# Altium PCB MainPCB.PcbDoc (part 1 of 2)
Units mm, origin at the board's own origin, x right, y up, seen from the top; angles counter-clockwise.
Board outline 53.21 x 33.91 mm, 4 copper layers (Top Layer, Ground, Power, Bottom Layer), stack 0.603 mm thick; 43 components, 63 nets, 250 pads, 105 vias.
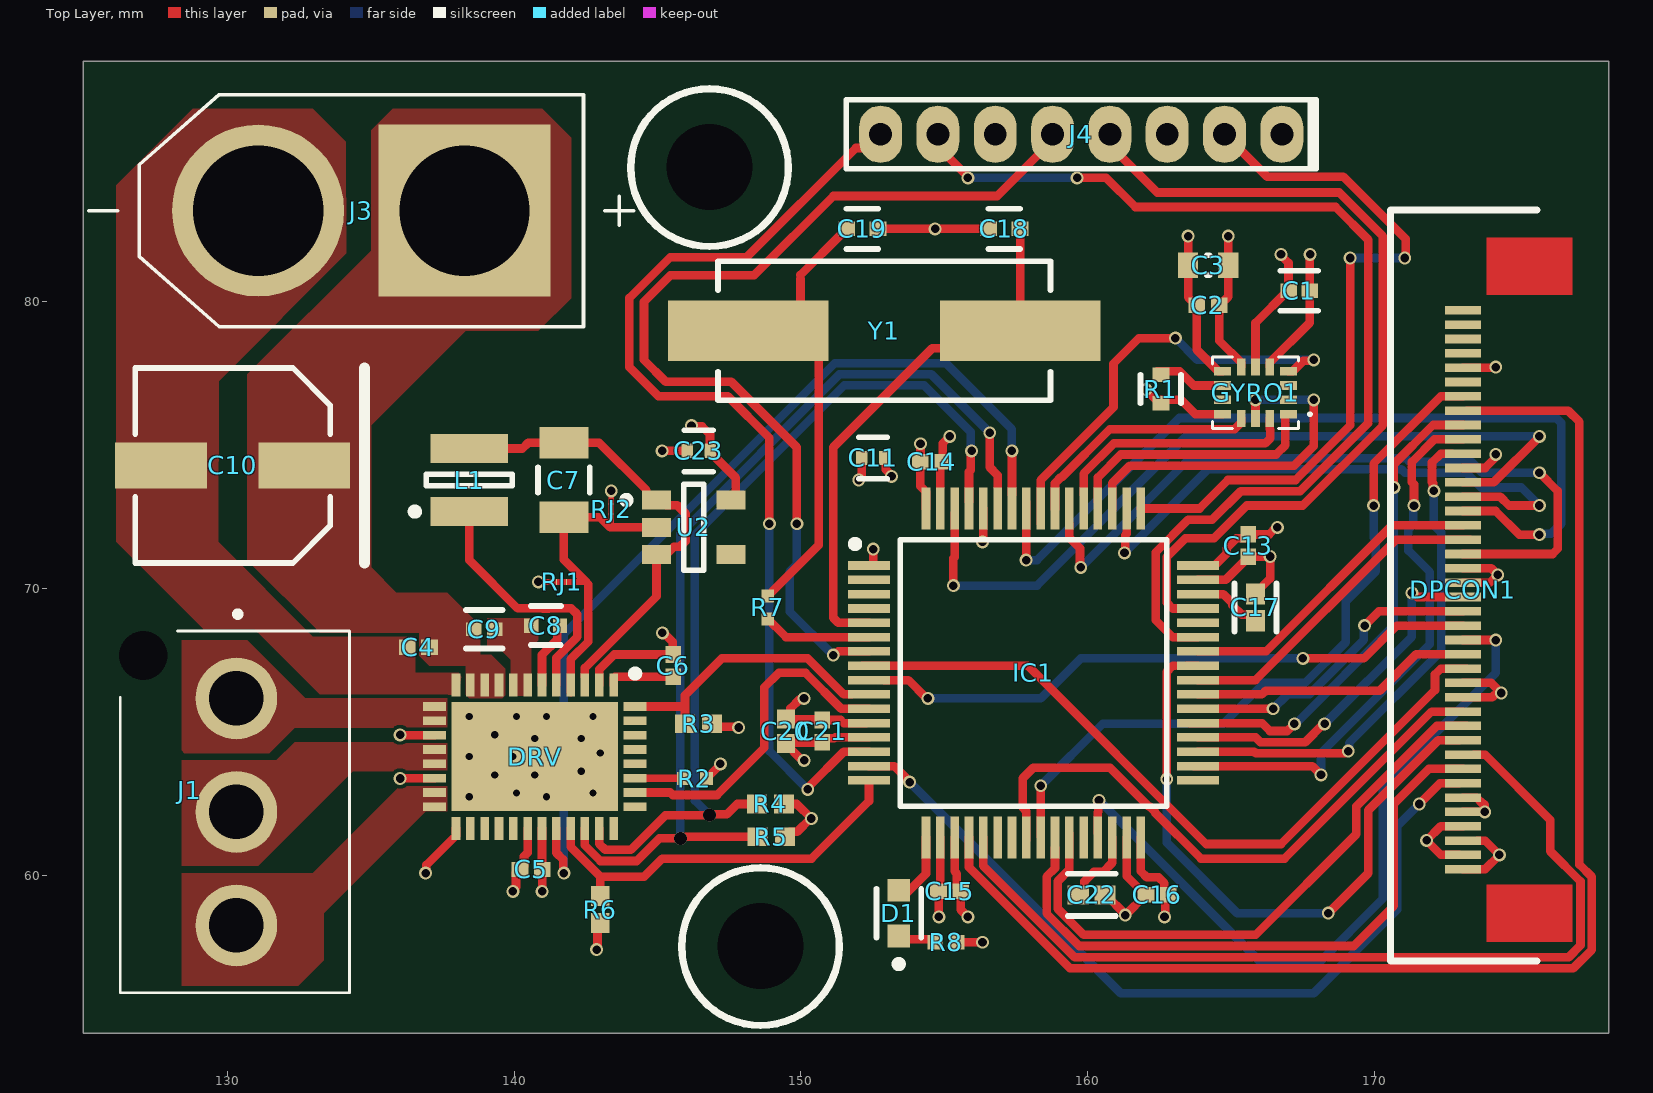
[diagram p0: Top Layer view]
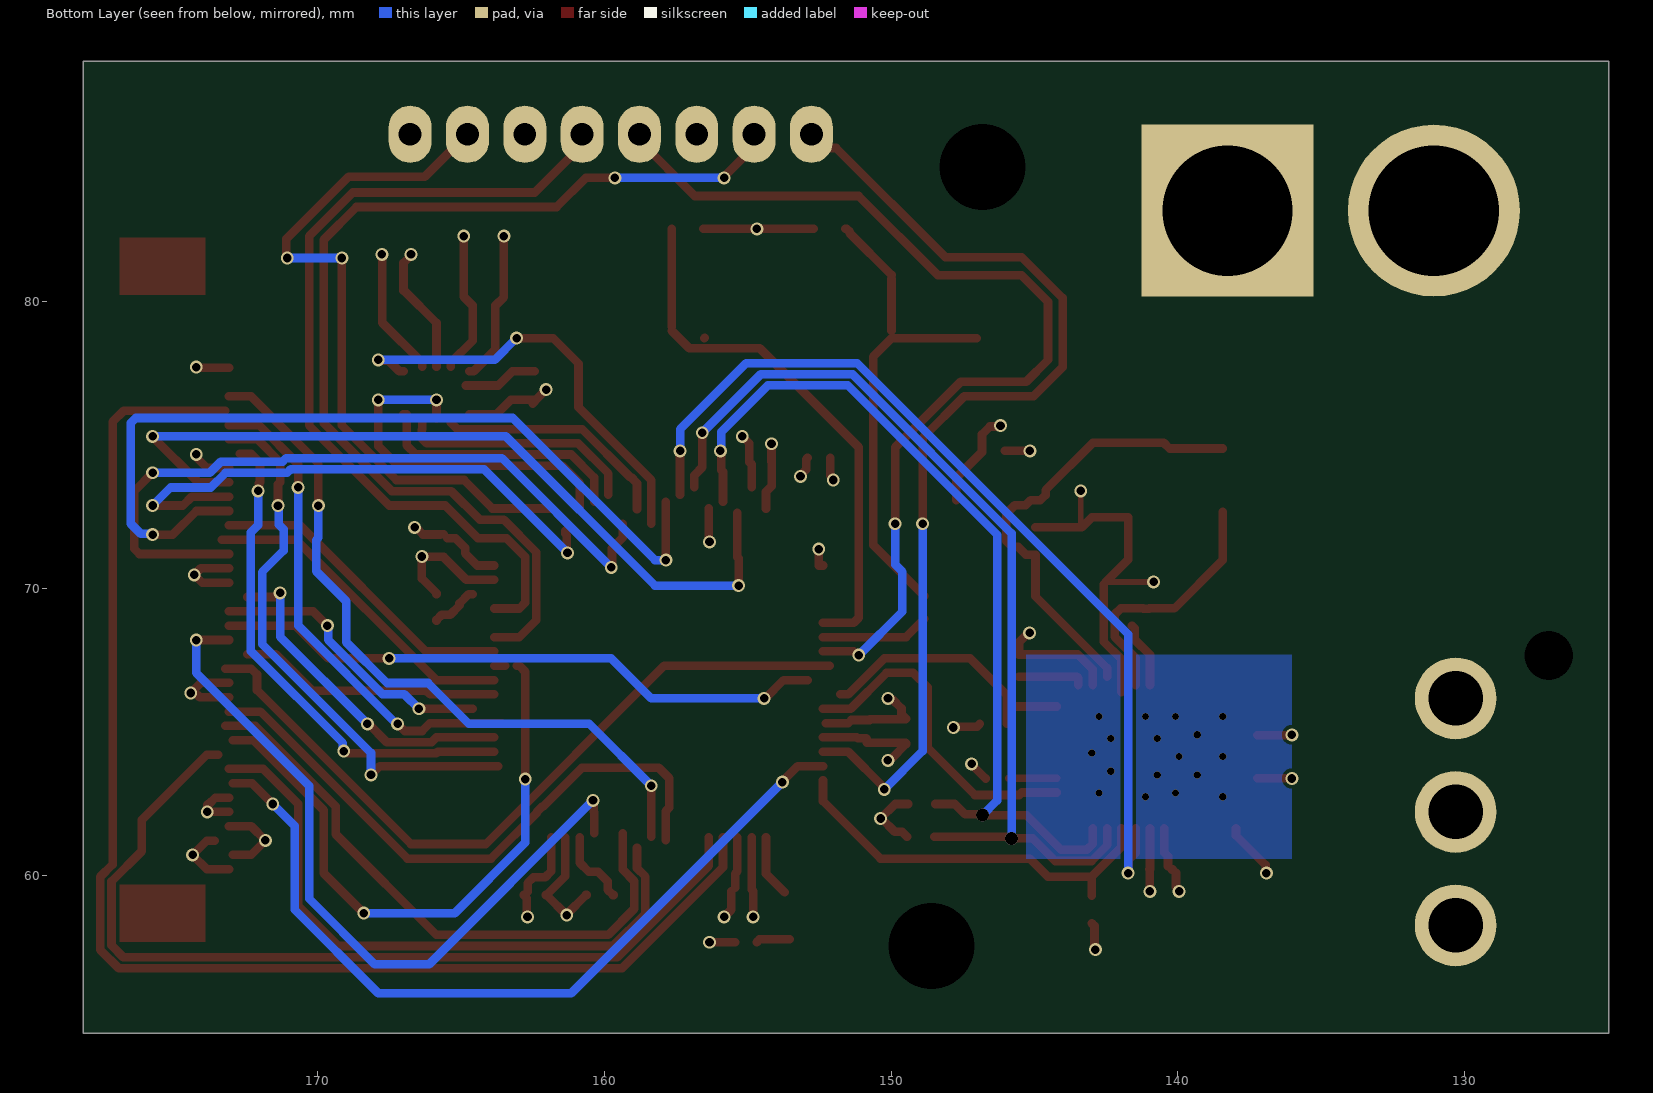
[diagram p1: Bottom Layer view, seen from below]
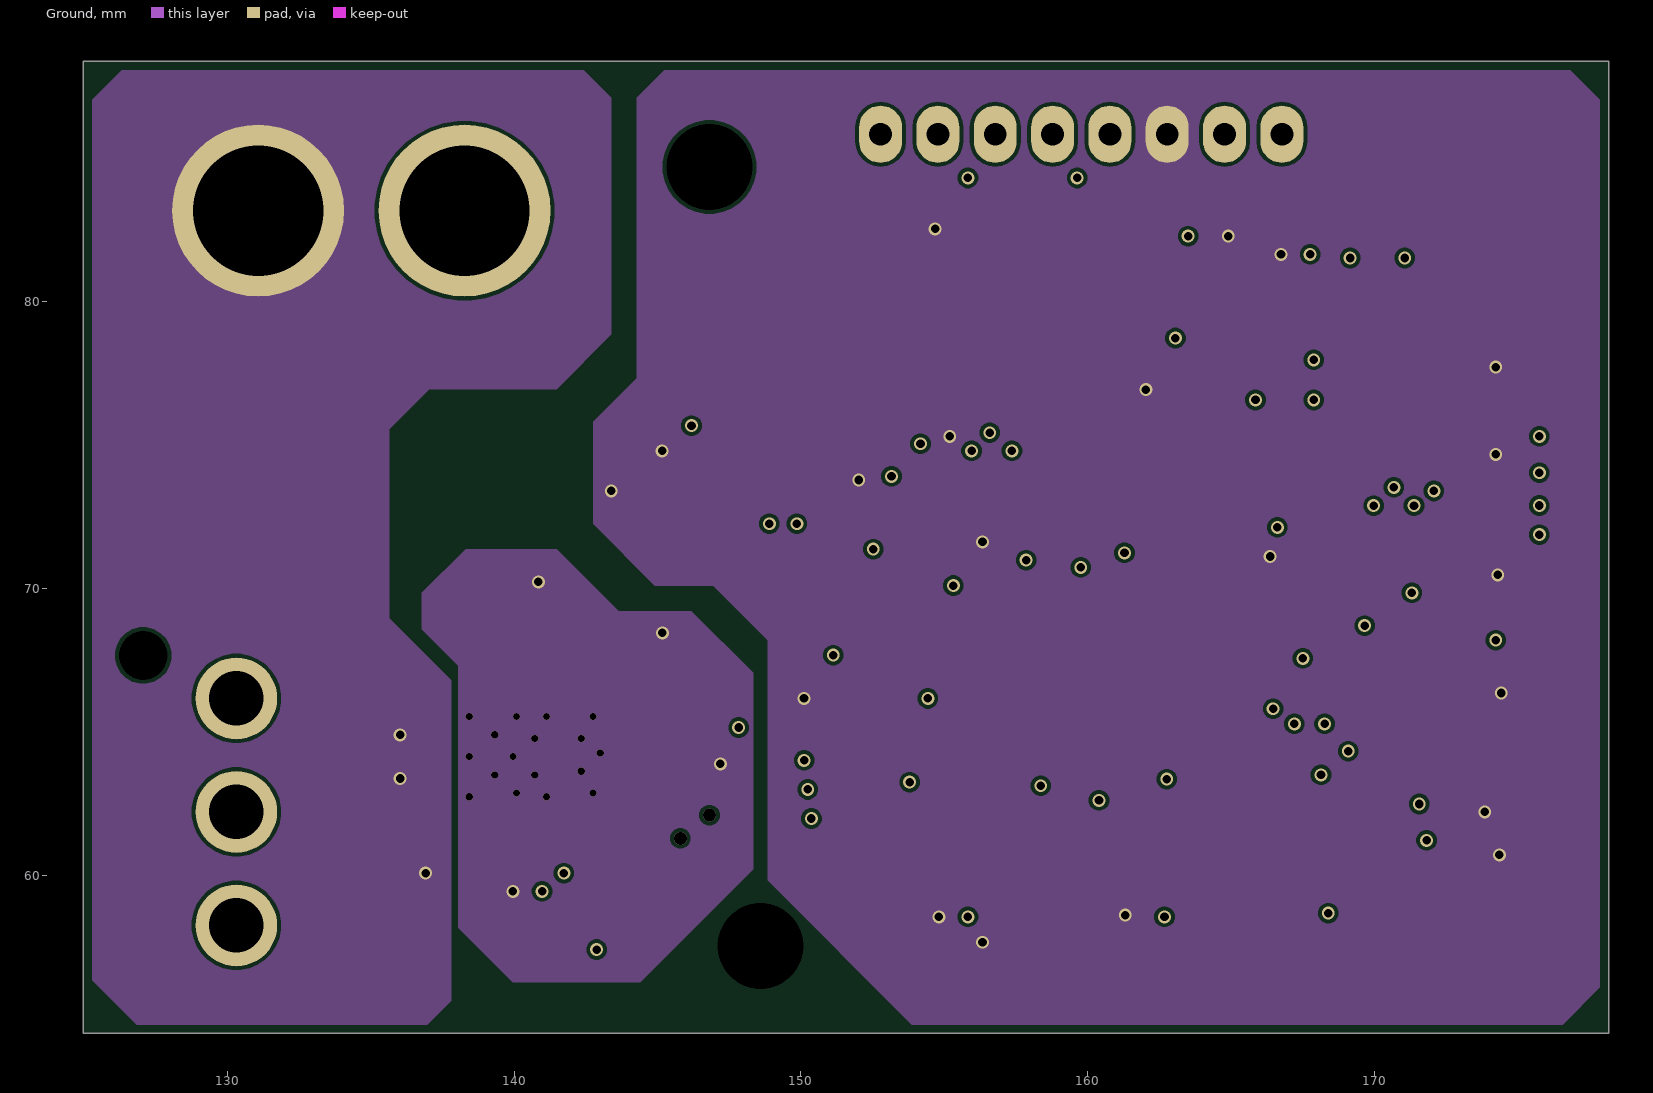
[diagram p2: Ground]
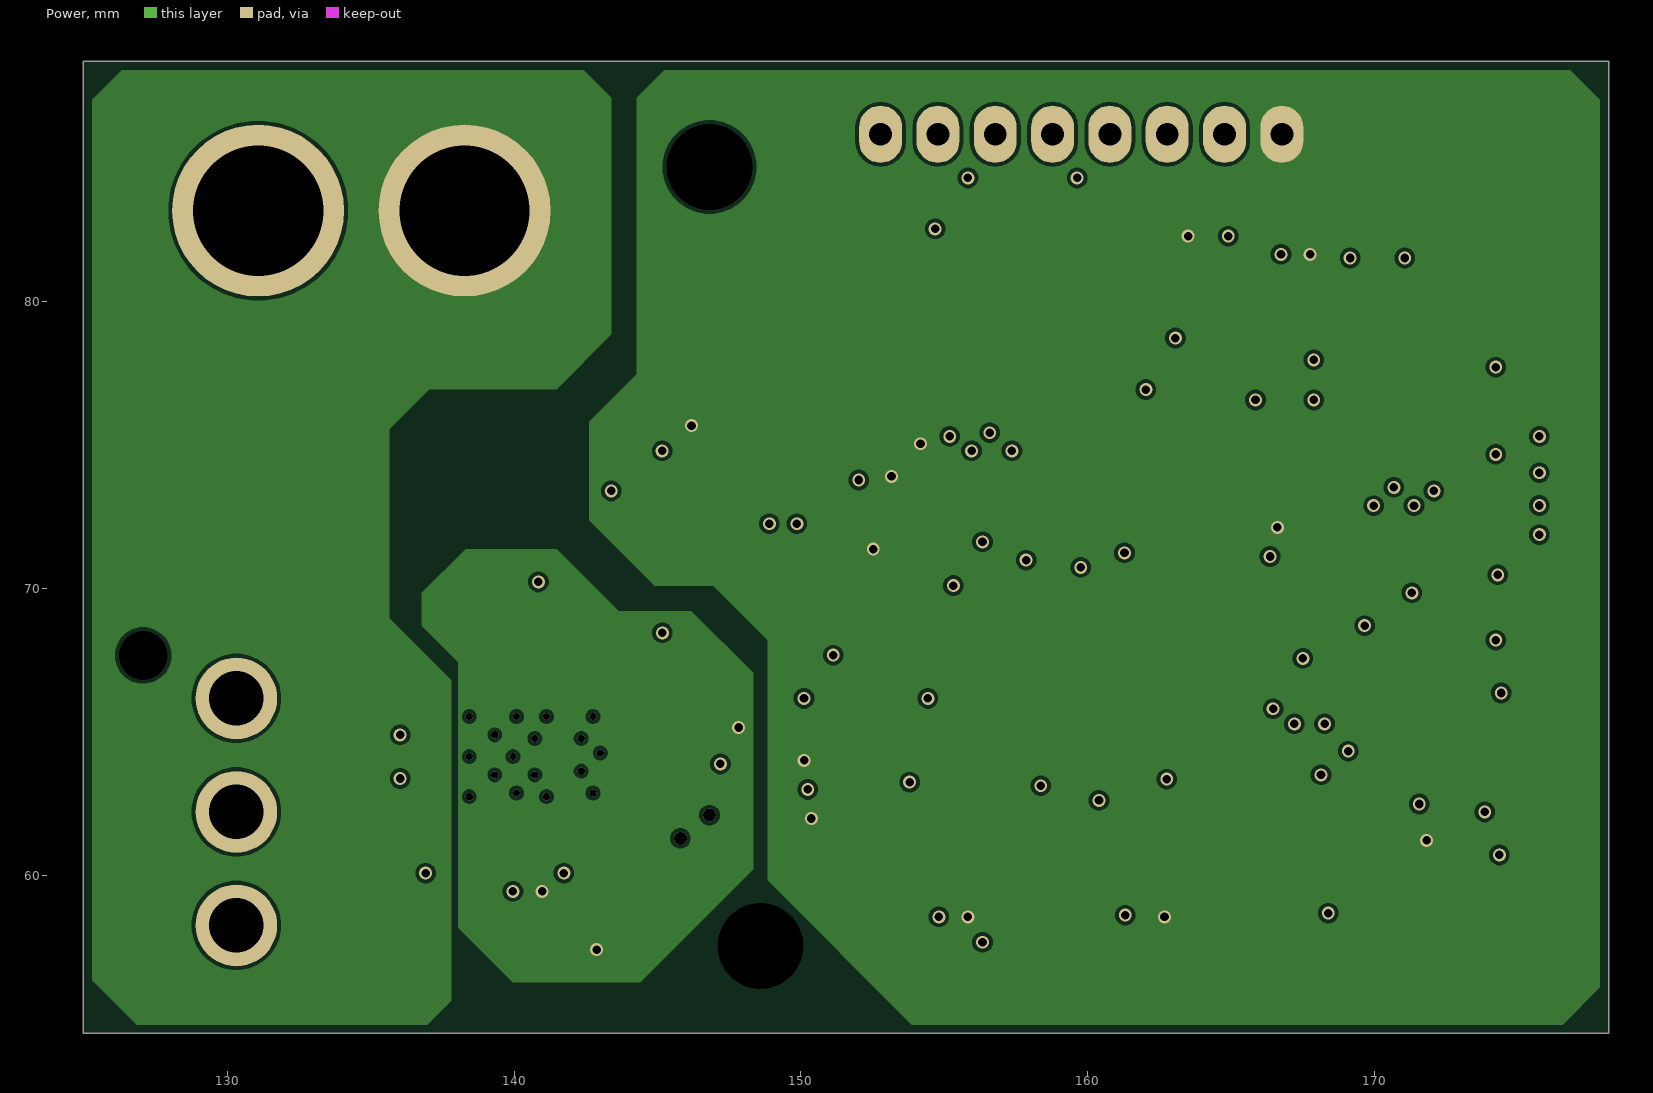
[diagram p3: Power]
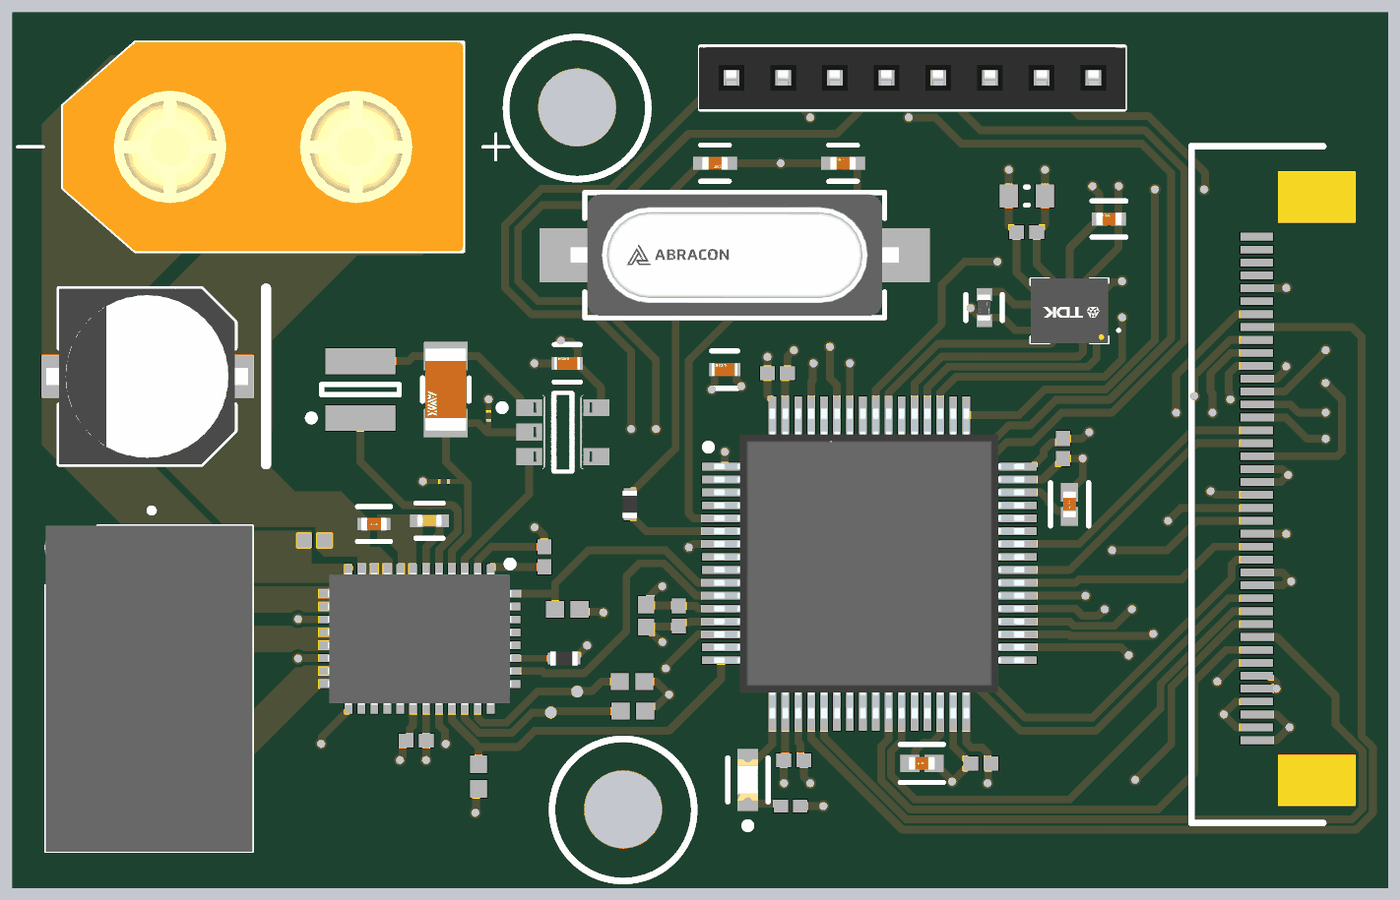
[diagram p4: 3D render of the assembled board from above, using the file's embedded part models]

## Layer stack, top to bottom
Top Solder: solder mask 0.0102, Solder Resist, Dk 3.5
Top Layer: signal copper 0.0356
Dielectric 2: prepreg 0.0711, PP-006, Dk 4.1
Ground: signal copper 0.035
Dielectric 1: dielectric 0.32, FR-4, Dk 4.8
Power: signal copper 0.035
Dielectric 3: prepreg 0.0711, PP-006, Dk 4.1
Bottom Layer: signal copper 0.0356
Bottom Solder: solder mask 0.0102, Solder Resist, Dk 3.5

## Board outline
124.968,54.483 178.181,54.483 178.181,88.392 124.968,88.392

## Design rules (kind name [scope] priority, off if disabled: settings)
BoardOutlineClearance [All] p1: gap=0.254 ignorepadtopadclearanceinfootprint=FALSE except(0: Arc-SplitContinuation Track-SplitContinuation SMDPad-SplitContinuation THPad-SplitContinuation Via-SplitContinuation Fill-SplitContinuation Poly-SplitContinuation Region-SplitContinuation Text-SplitContinuation; 0.3: Track-OutlineEdge SMDPad-OutlineEdge THPad-OutlineEdge Via-OutlineEdge Fill-OutlineEdge Poly-OutlineEdge Region-OutlineEdge Text-OutlineEdge)
Clearance [All] p1: gap=0.127 ignorepadtopadclearanceinfootprint=FALSE except(0: SMDPad-Via SMDPad-Hole THPad-Via THPad-Hole Via-Hole Fill-Hole Poly-Hole Region-Hole Text-Hole; 0.089: Arc-Arc Arc-Track Track-Track; 0.2: Arc-SMDPad Track-SMDPad; 0.254: Arc-Via Track-Via Via-Via; 0.33: Arc-THPad Arc-Hole Track-THPad Track-Hole; 0.5: THPad-THPad)
HoleSize [All] p1: absolutevalues=TRUE maxlimit=6.3 minlimit=0.025 maxpercent=80.000 minpercent=20.000
HoleToHoleClearance [All] p1: gap=0.5 allowstackedmicrovias=TRUE
MinimumSolderMaskSliver [All] p1: minsoldermaskwidth=0.1
PlaneConnect [All] p1: planeconnectstyle=Direct reliefexpansion=0.508 reliefentries=4 reliefconductorwidth=0.254 reliefairgap=0.254
PolygonConnect [All] p1: connectstyle=Direct reliefconductorwidth=0.254 reliefentries=4 polygonreliefangle="90 Angle" airgapwidth=0.254
RoutingVias [All] p1: holewidth=0.3 width=0.45 viastyle="Through Hole" minholewidth=0.15 minwidth=0.25 maxholewidth=6.35 maxwidth=7
SilkToSolderMaskClearance [IsPad] p1: minsilkscreentomaskgap=0.15 clearancetoexposedcopper=TRUE
SolderMaskExpansion [All] p1: expansion=0.038 istentingtop=FALSE
Width [All] p1: maxlimit=1 minlimit=0.089 preferedwidth=0.3
25 further rules are at their usual default settings.

## Classes and differential pairs
component class U_MotorDriver: C4 C5 C6 C7 C8 C9 C10 C23 DRV J1 J3 L1 R2 R3 R4 R5 R6 RJ1 RJ2 U2
component class U_MCU: C11 C13 C14 C15 C16 C17 C18 C19 C20 C21 C22 D1 DPCON1 IC1 J4 R7 R8 Y1
component class U_Gyroscope: C1 C2 C3 GYRO1 R1

## Components (designator, comment, footprint, x,y, rotation, side; value= is the part's Value field where it differs from the comment)
C1 "10nF" FP-0402-L_1_0_1-W_0_5_0_1-IPC_C 167.386,80.391 r180 top
C2 "0.1uF" CAPC1005X56X25LL10T15 164.202,79.883 r180 top
C3 "2.2uF" CAPC0603(1608)100_L 164.211,81.28 r0 top
C4 "0.1uF" CAPC1005X56X25LL10T15 136.652,67.945 r0 top
C5 "0.1uF" CAPC1005X56X25LL10T15 140.589,60.198 r0 top
C6 "0.1uF" CAPC1005X56X25LL10T15 145.542,67.31 r270 top
C7 "22uF" FP-1206-L_3_2_0_2-W_1_6_0-IPC_C 141.732,73.787 r270 top
C8 "47nF" FP-CC0402-MFG 141.097,68.707 r180 top value="47 nF"
C9 "1uF" FP-C1005-050-0_05-IPC_C 138.952,68.58 r180 top
C10 "100uF" PNSC-FK-V-D8_V 130.175,74.295 r180 top
C11 "4.7uF" FP-C1005-050-0_15-MFG 152.518,74.558 r180 top
C13 "100nF" CAPC1005X56X25LL10T15 165.608,71.501 r90 top
C14 "100nF" CAPC1005X56X25LL10T15 154.559,74.422 r180 top
C15 "100nF" CAPC1005X56X25LL10T15 155.194,59.436 r0 top
C16 "100nF" CAPC1005X56X25LL10T15 162.433,59.309 r0 top
C17 "2.2uF" FP-C1005-050-0_05-IPC_A 165.862,69.342 r90 top
C18 "04025A180JAT2A" FP-0402-L_1_0_1-W_0_5_0_1-MFG 157.099,82.55 r180 top
C19 "04025A180JAT2A" FP-0402-L_1_0_1-W_0_5_0_1-MFG 152.146,82.55 r0 top
C20 "1uF" CAPC1005X60X30NL05T10 149.479,65.024 r270 top
C21 "100nF" CAPC1005X56X25LL10T15 150.749,65.024 r270 top
C22 "2.2uF" FP-C1005-050-0_05-IPC_A 160.147,59.309 r0 top
C23 "4.7uF" FP-C1005-050-0_15-MFG 146.431,74.803 r180 top
D1 "150060GS75000" FP-150060GS75000-MFG 153.416,58.674 r90 top
DPCON1 "ER-CON40HT-1" ER-CON40HT-1 172.476,60.207 r90 top locked
DRV "MCT8316A1VRGFR" QFN50P500X700X100-41N-D 140.716,64.135 r270 top
GYRO1 "ICM-42688-V" IIM42352 165.862,76.835 r180 top
IC1 "STM32H7A3RGT6" QFP50P1200X1200X160-64N 158.115,67.056 r0 top locked
J1 "DF63M-3P-3.96DSA" DF63M3P396DSA 130.302,66.167 r90 top
J3 "XT60-M" AMASS_XT60-M 134.664,83.185 r180 top
J4 "NPPN081BFCN-RC" "SULLINS NPPN081BFCN" 159.782,85.852 r180 top
L1 "47uH" BOUR-SRN3015-2_V 138.43,73.787 r90 top
R1 "10kOhm" FP-RT0402-MFG 162.56,76.962 r270 top value=10KΩ
R2 "ERJ2RKF1002X" RESC1005X40X25LL05T05 146.304,63.373 r0 top
R3 "RC0402JR-075K1L" RESC1005X40X25ML05T10 146.431,65.278 r180 top
R4 "RC0402JR-075K1L" RESC1005X40X25ML05T10 148.938,62.484 r0 top
R5 "RC0402JR-075K1L" RESC1005X40X25ML05T10 148.971,61.341 r0 top
R6 "RC0402JR-075K1L" RESC1005X40X25ML05T10 143.002,58.801 r270 top
R7 "ERJ-2RKF1000X" RESC1005X40X25LL05T05 148.844,69.342 r90 top
R8 "RK73H1ETTP1001F" RESC1005X40X25LL10T10 155.067,57.658 r180 top
RJ1 "Net Tie 10x8mil" "New footprint 1" 141.653,70.231 r0 top net-tie
RJ2 "Net Tie 10x8mil" "New footprint 1" 143.383,72.771 r90 top net-tie
U2 "MIC5504-3.3YM5-TR" FP-SOT23-5LD-PL-1-MFG 146.261,72.136 r0 top
Y1 "ABLS2-8.000MHZ-D4Y-T" FP-ABLS2-MFG 152.908,78.994 r0 top

## Footprints (in the part's own frame and the unit in brackets; to place one, negate y for a bottom-side part, rotate by r counter-clockwise, add the part's x,y. Pads: shape width x height; smd on the part's side, far side on the other; paste and mask are expansions set on the pad)
AMASS_XT60-M [mm]
  round 6 hole 4.55: N(3.6,0)
  rect 6x6 / inner round 6 / far side rect 6x6 hole 4.55: P(-3.6,0)
  silkscreen extent -9.5,-4.05 9.5,4.05, body extent -7.75,-4.05 7.75,4.05, height 16.08
BOUR-SRN3015-2_V [mm] "SMD, 2-Leads, Body 3x3mm, Height 1.5mm"
  rect 1x2.7 smd: 1(-1.1,0) 2(1.1,0)
  silkscreen extent -1.22,-1.5 0.2,2.02, body extent -1.5,-1.5 1.5,1.5, height 1.5
CAPC0603(1608)100_L [mm] "Chip Capacitor, Body 1.6x0.8mm, Height 1.0mm, IPC High Density"
  rect 0.7x0.9 smd: 1(-0.7,0) 2(0.7,0)
  silkscreen extent -0.05,-0.35 0.05,0.35, body extent -0.87,-0.47 0.88,0.48, height 1
CAPC1005X56X25LL10T15 [mm] "Chip Capacitor, 2-Leads, Body 1.00x0.50mm, IPC High Density"
  rect 0.58x0.54 smd: 1(-0.39,0) 2(0.39,0)
  body extent -0.55,-0.3 0.55,0.3, height 0.56
CAPC1005X60X30NL05T10 [mm] "Chip Capacitor, 2-Leads, Body 1.00x0.50mm, IPC Medium Density"
  rect 0.66x0.62 smd: 1(-0.43,0) 2(0.43,0)
  body extent -0.53,-0.28 0.53,0.27, height 0.6
DF63M3P396DSA [mm]
  round 2.85 hole 1.9: 1(0,0) 2(-3.96,0) 3(-7.92,0)
  round 0.85 hole 1.7 unplated: MH1(1.5,3.25)
  silkscreen extent -10.27,-3.95 3.04,4.05, body extent -10.27,-3.95 2.35,4.05, height 10.1
ER-CON40HT-1 [mm]
  rect 0.3x1.25 smd mask+0.05: 1(0,-0.625) 2(0.5,-0.625) 3(1,-0.625) 4(1.5,-0.625) 5(2,-0.625) 6(2.5,-0.625) 7(3,-0.625) 8(3.5,-0.625) 9(4,-0.625) 10(4.5,-0.625) 11(5,-0.625) 12(5.5,-0.625) 13(6,-0.625) 14(6.5,-0.625) 15(7,-0.625) 16(7.5,-0.625) 17(8,-0.625) 18(8.5,-0.625) 19(9,-0.625) 20(9.5,-0.625) 21(10,-0.625) 22(10.5,-0.625) 23(11,-0.625) 24(11.5,-0.625) 25(12,-0.625) 26(12.5,-0.625) 27(13,-0.625) 28(13.5,-0.625) 29(14,-0.625) 30(14.5,-0.625) 31(15,-0.625) 32(15.5,-0.625) 33(16,-0.625) 34(16.5,-0.625) 35(17,-0.625) 36(17.5,-0.625) 37(18,-0.625) 38(18.5,-0.625) 39(19,-0.625) 40(19.5,-0.625)
  Top Layer region: 22.04,-1.45 20.04,-1.45 20.04,-4.45 22.04,-4.45
  Top Layer region: -2.54,-4.45 -0.54,-4.45 -0.54,-1.45 -2.54,-1.45
  silkscreen extent -3.2,-3.2 23,1.9, body extent -3.08,-7.4 22.57,-0.1, height 2
FP-0402-L_1_0_1-W_0_5_0_1-IPC_C [mm]
  rect 0.581x0.512 smd paste+0 mask+0: 1(-0.366,0) 2(0.366,0)
  silkscreen extent -0.66,-0.7 0.66,0.7, body extent -0.76,-0.4 0.76,0.4, height 0.25
FP-0402-L_1_0_1-W_0_5_0_1-MFG [mm]
  rect 0.6x0.5 smd paste+0 mask+0: 1(-0.55,0) 2(0.55,0)
  silkscreen extent -0.55,-0.7 0.55,0.7, body extent -0.95,-0.4 0.95,0.4, height 0.25
FP-1206-L_3_2_0_2-W_1_6_0-IPC_C [mm]
  rect 1.105x1.706 smd paste+0 mask+0: 1(-1.301,0) 2(1.301,0)
  silkscreen extent -0.45,-0.9 0.45,0.9, body extent -1.95,-1 1.95,1, height 0.25
FP-150060GS75000-MFG [mm]
  rect 0.8x0.8 smd paste+0 mask+0: 1(-0.8,0) 2(0.8,0)
  silkscreen extent -1.9,-0.78 0.85,0.78, body extent -1.3,-0.55 1.3,0.55, height 0.25
FP-ABLS2-MFG [mm]
  rect 5.6x2.1 smd paste+0 mask+0: 1(-4.75,0) 2(4.75,0)
  silkscreen extent -5.8,-2.42 5.8,2.42, body extent -7.65,-2.52 7.65,2.52, height 0.25
FP-C1005-050-0_05-IPC_A [mm]
  rect 0.739x0.672 smd paste+0 mask+0: 1(-0.467,0) 2(0.467,0)
  silkscreen extent -0.84,-0.74 0.84,0.74, body extent -1.04,-0.54 1.04,0.54, height 0.25
FP-C1005-050-0_05-IPC_C [mm]
  rect 0.539x0.472 smd paste+0 mask+0: 1(-0.367,0) 2(0.367,0)
  silkscreen extent -0.64,-0.67 0.64,0.67, body extent -0.74,-0.38 0.74,0.38, height 0.25
FP-C1005-050-0_15-MFG [mm]
  rect 0.4x0.5 smd paste+0 mask+0: 1(-0.4,0) 2(0.4,0)
  silkscreen extent -0.5,-0.73 0.5,0.73, body extent -0.7,-0.43 0.7,0.43, height 0.25
FP-CC0402-MFG [mm]
  rect 0.5x0.5 smd paste+0 mask+0: 1(-0.5,0) 2(0.5,0)
  silkscreen extent -0.53,-0.68 0.53,0.67, body extent -0.87,-0.48 0.87,0.48, height 0.25
FP-RT0402-MFG [mm]
  rect 0.5x0.6 smd paste+0 mask+0: 1(-0.5,0) 2(0.5,0)
  silkscreen extent -0.5,-0.71 0.5,0.7, body extent -0.85,-0.4 0.85,0.4, height 0.25
FP-SOT23-5LD-PL-1-MFG [mm]
  rect 1x0.66 smd paste+0 mask+0: 1(-1.3,0.95) 2(-1.3,0) 3(-1.3,-0.95) 4(1.3,-0.95) 5(1.3,0.95)
  silkscreen extent -2.47,-1.5 0.35,1.5, body extent -1.9,-1.6 1.9,1.6, height 0.25
IIM42352 [mm]
  rect 0.6x0.3 smd: 1(-1.15,0.75) 2(-1.15,0.25) 3(-1.15,-0.25) 4(-1.15,-0.75) 8(1.15,-0.75) 9(1.15,-0.25) 10(1.15,0.25) 11(1.15,0.75)
  rect 0.3x0.6 smd: 5(-0.5,-0.9) 6(0,-0.9) 7(0.5,-0.9) 12(0.5,0.9) 13(0,0.9) 14(-0.5,0.9)
  silkscreen extent -1.95,-1.25 1.5,1.25, body extent -1.5,-1.25 1.5,1.25, height 0.9
"New footprint 1" [mil]
  rect 1x8 smd: 1(-6.89,0) 2(6.89,0)
  Top Layer region: -6.89,-4 6.89,-4 6.89,4 -6.89,4
PNSC-FK-V-D8_V [mm] "CAPAE, 2-Leads, Body 6.80x6.80mm"
  rect 3.2x1.6 smd: 1(-2.5,0) 2(2.5,0)
  silkscreen extent -4.6,-3.4 3.4,3.4, body extent -3.9,-3.4 3.9,3.4, height 8
QFN50P500X700X100-41N-D [mm]
  rect 0.8x0.3 smd: 1(-2.5,2.75) 2(-2.5,2.25) 3(-2.5,1.75) 4(-2.5,1.25) 5(-2.5,0.75) 6(-2.5,0.25) 7(-2.5,-0.25) 8(-2.5,-0.75) 9(-2.5,-1.25) 10(-2.5,-1.75) 11(-2.5,-2.25) 12(-2.5,-2.75) 21(2.5,-2.75) 22(2.5,-2.25) 23(2.5,-1.75) 24(2.5,-1.25) 25(2.5,-0.75) 26(2.5,-0.25) 27(2.5,0.25) 28(2.5,0.75) 29(2.5,1.25) 30(2.5,1.75) 31(2.5,2.25) 32(2.5,2.75)
  rect 0.3x0.8 smd: 13(-1.75,-3.5) 14(-1.25,-3.5) 15(-0.75,-3.5) 16(-0.25,-3.5) 17(0.25,-3.5) 18(0.75,-3.5) 19(1.25,-3.5) 20(1.75,-3.5) 33(1.75,3.5) 34(1.25,3.5) 35(0.75,3.5) 36(0.25,3.5) 37(-0.25,3.5) 38(-0.75,3.5) 39(-1.25,3.5) 40(-1.75,3.5)
  rect 3.8x5.8 smd: 41(0,0)
  silkscreen extent -3.02,3.38 -2.78,3.63, body extent -2.55,-3.55 2.55,3.55, height 1
QFP50P1200X1200X160-64N [mm]
  rect 1.475x0.3 smd: 1(-5.738,3.75) 2(-5.738,3.25) 3(-5.738,2.75) 4(-5.738,2.25) 5(-5.738,1.75) 6(-5.738,1.25) 7(-5.738,0.75) 8(-5.738,0.25) 9(-5.738,-0.25) 10(-5.738,-0.75) 11(-5.738,-1.25) 12(-5.738,-1.75) 13(-5.738,-2.25) 14(-5.738,-2.75) 15(-5.738,-3.25) 16(-5.738,-3.75) 33(5.738,-3.75) 34(5.738,-3.25) 35(5.738,-2.75) 36(5.738,-2.25) 37(5.738,-1.75) 38(5.738,-1.25) 39(5.738,-0.75) 40(5.738,-0.25) 41(5.738,0.25) 42(5.738,0.75) 43(5.738,1.25) 44(5.738,1.75) 45(5.738,2.25) 46(5.738,2.75) 47(5.738,3.25) 48(5.738,3.75)
  rect 0.3x1.475 smd: 17(-3.75,-5.738) 18(-3.25,-5.738) 19(-2.75,-5.738) 20(-2.25,-5.738) 21(-1.75,-5.738) 22(-1.25,-5.738) 23(-0.75,-5.738) 24(-0.25,-5.738) 25(0.25,-5.738) 26(0.75,-5.738) 27(1.25,-5.738) 28(1.75,-5.738) 29(2.25,-5.738) 30(2.75,-5.738) 31(3.25,-5.738) 32(3.75,-5.738) 49(3.75,5.738) 50(3.25,5.738) 51(2.75,5.738) 52(2.25,5.738) 53(1.75,5.738) 54(1.25,5.738) 55(0.75,5.738) 56(0.25,5.738) 57(-0.25,5.738) 58(-0.75,5.738) 59(-1.25,5.738) 60(-1.75,5.738) 61(-2.25,5.738) 62(-2.75,5.738) 63(-3.25,5.738) 64(-3.75,5.738)
  silkscreen extent -6.35,-4.65 4.65,4.65, body extent -6,-6 6,6, height 1.6
RESC1005X40X25LL05T05 [mm] "Chip Resistor, 2-Leads, Body 1.05x0.55mm, IPC High Density"
  rect 0.45x0.45 smd: 1(-0.4,0) 2(0.4,0)
  body extent -0.53,-0.28 0.53,0.28, height 0.4
RESC1005X40X25LL10T10 [mm] "Chip Resistor, 2-Leads, Body 1.00x0.50mm, IPC High Density"
  rect 0.55x0.5 smd: 1(-0.375,0) 2(0.375,0)
  body extent -0.55,-0.3 0.55,0.3, height 0.4
RESC1005X40X25ML05T10 [mm] "Chip Resistor, 2-Leads, Body 1.00x0.50mm, IPC Low Density"
  rect 0.7x0.65 smd: 1(-0.475,0) 2(0.475,0)
  body extent -0.53,-0.27 0.53,0.28, height 0.4
"SULLINS NPPN081BFCN" [mm]
  oval 1.5x2 hole 0.8: 1(-7,0) 2(-5,0) 3(-3,0) 4(-1,0) 5(1,0) 6(3,0) 7(5,0) 8(7,0)
  silkscreen extent -8.2,-1.2 8.2,1.2, body extent -8.25,-1.2 8.25,1.2, height 4.41

## Part data
C1: library part CMP-2008-02516-2, "04023C103KAT2A", Case Code (Imperial)=0402, Case Code (Metric)=1005, Dielectric=X7R, Insulation Resistance=100GR, Max Operating Temperature=125°C, Min Operating Temperature=-55°C, Package Quantity=1, Tolerance=10%, Voltage=25V, Capacitance=10nF, Case/Package=0402, Construction=Flat, Depth=0.5mm, Dissipation Factor=12.5%, Height=0.56mm, Lead Free="Lead Free", Length=1mm, Mount="Surface Mount", Packaging="Tape and Reel", Radiation Hardening=No, REACH SVHC="No SVHC", RoHS Compliant=Yes, Series=-, Termination=SMD/SMT, Thickness=0.022inch, Voltage Rating=25V, Voltage Rating (DC)=25V, Width=0.02inch
C2 C4 C5 C6: library part CMP-2008-02972-1, "04023C104JAT2A", Manufacturer="AVX Interconnect / Elco", Part Number=04023C104JAT2A
C3: library part CMP-1035-02758-1, "C0603C225K8PAC", Case-EIA=0603, Case-Metric=1608, Rated Voltage="10 V", Tolerance=Â±10%, Max Thickness="1 mm", Technology=SMT
C7: library part CMP-2000-05869-2, "12066D226MAT2A", Case Code (Imperial)=1206, Case Code (Metric)=3216, Dielectric=X5R, Max Operating Temperature=85°C, Min Operating Temperature=-55°C, Package Quantity=1, Tolerance=20%, Voltage=6.3V, Capacitance=22uF, Case/Package=1206, Construction=Flat, Contact Plating=Tin, Depth=1.6mm, Height=0.07mm, Lead Free="Lead Free", Length=3.2mm, Mount="Surface Mount", Number of Pins=2, Packaging="Tape and Reel", Radiation Hardening=No, REACH SVHC="No SVHC", RoHS Compliant=Yes, Series=-, Termination=SMD/SMT, Thickness=0.07inch, Voltage Rating=6.3V, Voltage Rating (DC)=6.3V, Width=0.063inch
C8: library part CMP-03422-000813-1, "CC0402KRX7R8BB473", Capacitance="47 nF", Manufacturer=YAGEO, Package=CC0402, Temperature="-55°C to +125°C", Temperature Characteristic=X7R, Temperature Coefficient=30ppm/°C, Temperature Range High=+125°C, Temperature Range Low=-55°C, Tolerance=0.1, Voltage Rating="25 V", Automotive=No, Automotive Grade=NA, Category=Cap, ComponentLink2Description=Datasheet, ComponentLink2URL=http://www.yageo.com/documents/recent/UPY-GP_NP0_16V-to-50V_16.pdf, Device Class L1="Passive Components", Device Class L2=Capacitors, Device Class L3="Ceramic Capacitors", Digikey Description="CAP CER 0.047UF 25V X7R 0402", Footprint Url=http://www.yageo.com/exep/pages/download/literatures/UPY-C_GEN_24.pdf, Height=0.55mm, Ipc Land Pattern Name=CAPC10050X50, Lead Free=Yes, Manufacturer Part Number=CC0402KRX7R8BB473, Material=Ceramic, Mouser Description="Multilayer Ceramic Capacitors MLCC - SMD/SMT 47nF 25V X7R 10%", Octopart=https://octopart.com/cc0402krx7r8bb473-yageo-22850998, RoHS=TRUE
C9: library part CMP-2000-06004-2, "C1005X5R1V105K050BC", Case Code (Imperial)=0402, Case Code (Metric)=1005, Dielectric=X5R, Dielectric Material=Ceramic, Max Operating Temperature=85°C, Min Operating Temperature=-55°C, Package Quantity=1, Tolerance=10%, Voltage Rating=35V, Capacitance=1uF, Case/Package=0402, Depth=0.5mm, Height=0.5mm, Lead Free="Lead Free", Length=1mm, Mount="Surface Mount", Packaging="Tape and Reel", Radiation Hardening=No, REACH SVHC="No SVHC", Resistor Type=Ceramic, RoHS Compliant=Yes, Series=C, Termination=SMD/SMT, Thickness=0.022inch, Voltage Rating (DC)=35V, Weight=2.3E-05oz, Width=0.02inch
C10: library part CMP-2000-06206-1, "EEEFK1E101XP", Capacitance=100µF, Case Size/Dimension=Ø6.3x7.7mm, Lifetime@Temperature=2000Hrs@105°C, Manufacturer=Panasonic, Operating Temp Range=-55to+105°C, Operating Temp-Max=105°C, Package Description="2-Pin Electrolytic Aluminum Capacitor, Body 6.6 x 6.6 mm", Package Reference=FK-V-D8, Rated Voltage=25V, Ripple Current=280mA, Datasheet URL=http://industrial.panasonic.com/cdbs/www-data/pdf/RDE0000/ABA0000C1181.pdf, Datasheet Version=03/2016, Impedance=0.34O, Manufacturer URL=http://www.panasonic.com/, Mounting Technology=SurfaceMount, Package URL=http://industrial.panasonic.com/cdbs/www-data/pdf/RDE0000/DME0000COL48.pdf, Series=FK, Type=Can
C11 C23: library part CMP-2000-05997-2, "CAP CER 4.7UF 10V X5R 0402 C1005X5R1A475K050BC", Case Code (Imperial)=0402, Case Code (Metric)=1005, Dielectric=X5R, Dielectric Material=Ceramic, Max Operating Temperature=85°C, Min Operating Temperature=-55°C, Package Quantity=10000, Tolerance=10%, Voltage Rating=10V, Capacitance=4.7uF, Case/Package=0402, Lead Free="Lead Free", Length=0.039inch, Mount="Surface Mount", Packaging="Cut Tape", REACH SVHC="No SVHC", RoHS Compliant=Yes, Series=C, Thickness=0.022inch, Voltage Rating (DC)=10V, Width=0.02inch
C13 C14 C15 C16 C21: library part CMP-2008-02743-1, "04026D104KAT2A", Manufacturer="AVX Interconnect / Elco", Part Number=04026D104KAT2A
C17 C22: library part CMP-08246-002709-1, "Multilayer Ceramic Capacitors 2.2μF ±10% 10V X5R SMD 0402 C1005X5R1A225K050BC", Case Code (Imperial)=0402, Case Code (Metric)=1005, Dielectric=X5R, Dielectric Material=Ceramic, Max Operating Temperature=85°C, Min Operating Temperature=-55°C, Package Quantity=1, Tolerance=10%, Voltage=10V, Capacitance=2.2uF, Case/Package=0402, Construction=Flat, Depth=0.5mm, Height=0.5mm, Lead Free="Lead Free", Length=1mm, Mount="Surface Mount", Number of Pins=2, Packaging="Tape and Reel", Radiation Hardening=No, REACH SVHC="No SVHC", Resistor Type=Ceramic, RoHS Compliant=Yes, Series=C, Termination=SMD/SMT, Thickness=0.022inch, Voltage Rating=10V, Voltage Rating (DC)=10V, Weight=2.3E-05oz, Width=0.02inch
C18 C19: library part CMP-1034-00865-3, "General Purpose Ceramic Capacitor, 0402, 18pF, 5%, C0G, 30ppm/°C, 50V", Capacitance=18pF, Case Code (Imperial)=0402, Case Code (Metric)=1005, Dielectric=C0G, Dielectric Material=Ceramic, Insulation Resistance=100GR, Max Operating Temperature=125°C, Min Operating Temperature=-55°C, Package Quantity=1, Temperature Coefficient=0ppm/°C, Tolerance=5%, Voltage=50V, Case/Package=0402, Contact Plating=Tin, Depth=0.5mm, Height=0.5mm, Lead Free="Lead Free", Length=1mm, Mount="Surface Mount", Number of Pins=2, Packaging="Tape and Reel", Radiation Hardening=No, REACH SVHC="No SVHC", RoHS Compliant=Yes, Termination=SMD/SMT, Thickness=0.022inch, Voltage Rating=50V, Voltage Rating (DC)=50V, Width=0.02inch
C20: library part CMP-2008-02056-1, "C0402C105M8PACTU", Manufacturer=Kemet, Part Number=C0402C105M8PACTU
D1: library part CMP-1426-00002-2, "LED GREEN CLEAR 0603 SMD", Case Code (Imperial)=0603, Case Code (Metric)=1608, Color=Green, Forward Current=30mA, Forward Voltage=3.2V, Lens Color=Colorless, Max Operating Temperature=85°C, Min Operating Temperature=-40°C, Package Quantity=1, Test Current=20mA, Case/Package=0603, Dominant Wavelength=520nm, Height=0.8mm, Lead Free="Lead Free", Length=1.6mm, Lens Size=0.7mm, Lens Style=Clear, Lens Transparency=Clear, Luminous Intensity=430mcd, Mount="Surface Mount", Packaging="Cut Tape", RoHS Compliant=Yes, Series=WL-SMCW, Viewing Angle=140°, Wavelength=520nm, Width=0.8mm
DPCON1: Manufacturer=EastRising
DRV: "Integrated Circuit", Manufacturer_Name="Texas Instruments", Mouser Part Number=595-MCT8316A1VRGFR, Arrow Part Number=MCT8316A1VRGFR, Arrow Price/Stock=https://www.arrow.com/en/products/mct8316a1vrgfr/texas-instruments?region=nac, Datasheet Link=https://www.ti.com/lit/gpn/mct8316a, Height=1mm, Manufacturer_Part_Number=MCT8316A1VRGFR, Mouser Price/Stock=https://www.mouser.co.uk/ProductDetail/Texas-Instruments/MCT8316A1VRGFR?qs=rSMjJ%252B1ewcSMvl4Q8e7VVQ%3D%3D
GYRO1: "Accelerometer", Manufacturer_Name=TDK, Mouser Part Number=410-ICM-42688-V, Datasheet Link=https://3cfeqx1hf82y3xcoull08ihx-wpengine.netdna-ssl.com/wp-content/uploads/2021/04/DS-000439-ICM-42688-V-v1.1.pdf, Manufacturer_Part_Number=ICM-42688-V, Mouser Price/Stock=https://www.mouser.co.uk/ProductDetail/TDK-InvenSense/ICM-42688-V?qs=iLbezkQI%252Bsj8X%2F1CCh43jQ%3D%3D
IC1: "Integrated Circuit", Manufacturer_Name=STMicroelectronics, Mouser Part Number=511-STM32H7A3RGT6, Datasheet Link=https://www.st.com/resource/en/datasheet/stm32h7a3ai.pdf, Height=1.6mm, Manufacturer_Part_Number=STM32H7A3RGT6, Mouser Price/Stock=https://www.mouser.co.uk/ProductDetail/STMicroelectronics/STM32H7A3RGT6?qs=sPbYRqrBIVk%252BdecRlyVesQ%3D%3D
J1: "Connector", Manufacturer_Name=Hirose, Mouser Part Number=798-DF63M-3P-3.96DSA, Datasheet Link=https://componentsearchengine.com/Datasheets/1/DF63M-3P-3.96DSA.pdf, Height=10mm, Manufacturer_Part_Number=DF63M-3P-3.96DSA, Mouser Price/Stock=https://www.mouser.co.uk/ProductDetail/Hirose-Connector/DF63M-3P-3.96DSA?qs=T3oQrply3y%2FuoC7pM2eZEQ%3D%3D
J3: "Plug; DC supply; XT60; male; PIN: 2; for cable; soldered; 30A; 500V", Package=Package, Availability="Not in stock", Check_prices=https://www.snapeda.com/parts/XT60-M/AMASS/view-part/?ref=eda, MF=AMASS, MP=XT60-M, Price=None, SnapEDA_Link=https://www.snapeda.com/parts/XT60-M/AMASS/view-part/?ref=snap
J4: "CONN HDR 8POS 0.079 GOLD PCB", Current Rating (Amps)=2A, Insulation Color=Black, Manufacturer="Sullins Connector Solutions", Material Flammability Rating="UL94 V-0", Operating Temperature="-40°C ~ 105°C", Supplier Part Number 1=S5751-08-ND, ComponentLink1Description=Datasheet, ComponentLink1URL=https://drawings-pdf.s3.amazonaws.com/10483.pdf, ComponentLink2Description="DigiKey Link", ComponentLink2URL=https://www.digikey.com/en/products/detail/sullins-connector-solutions/NPPN081BFCN-RC/804810, Connector Type=Header, Contact Finish - Mating=Gold, Contact Finish - Post=Gold, Contact Finish Thickness - Mating=Flash, Contact Length - Post="0.094\" (2.40mm)", Contact Type="Female Socket", Fastening Type=Push-Pull, Insulation Height="0.173\" (4.40mm)", LastUpdated="21.06.2022 14:43:53", Lifecycle Status=Active, Minimum Order=1, Mounting Type="Through Hole", Number of Positions=8, Number of Positions Loaded=All, Number of Rows=1, Packaging=Tube, Part Number=NPPN081BFCN-RC, Part Status=Active, Pitch - Mating="0.079\" (2.00mm)", Price=0.44, Series=-, Style="Board to Board", Supplier 1=DigiKey, Termination=Solder
L1: library part CMP-0007-00006-1, "SRN3015-470M", Inductance="47 uH", Inductance tolerance="+/- 20%", Manufacturer=Bourns, Operating Temperature="-40 to 125 degC", Rated current="0.4 A", Resistance to Solder Heat="+260 degC for 10 sec.", ComponentLink1Description="Manufacturer URL", ComponentLink1URL=http://www.bourns.com/, ComponentLink2Description=Datasheet, ComponentLink2URL=http://www.bourns.com/data/global/pdfs/SRN3015.pdf, ComponentLink3Description="Package Specification", ComponentLink3URL=http://www.bourns.com/data/global/pdfs/SRN3015.pdf, DatasheetVersion=Aug-11, DCR Max="1.406 Ohm", Isat="0.38 A", Mounting Technology="Surface Mount", PackageDescription="2-Pin SMD, Body 3 x 3 mm, Height 1.5 mm", PackageReference=SRN3015, Packing="Tape and Reel", PartNumber=SRN3015-470M, RoHS=TRUE, SRF Min="18 MHz"
R1: library part CMP-2002-03023-2, "RT0402FRE0710KL", Manufacturer=Yageo, Package=RT0402, Power Rating=0.063W, Resistance=10KΩ, Temperature="-55°C to +155°C", Temperature Coefficient="50 ppm/°C", Temperature Range High=+155°C, Temperature Range Low=-55°C, Tolerance=0.01, Voltage Rating=50V, Automotive=No, Category=Res, ComponentLink2Description=Datasheet, ComponentLink2URL=http://www.yageo.com/documents/recent/PYu-RT_1-to-0.01_RoHS_L_9.pdf, Composition="Thin Film", Device Class L1="Passive Components", Device Class L2=Resistors, Device Class L3="Chip SMD Resistors", Digikey Description="RES 10.0K OHM 1/16W 1% SMD 0402", Footprint Url=http://www.yageo.com/exep/pages/download/literatures/PYu-R_Mount_10.pdf, Height=0.35mm, Ipc Land Pattern Name=RESC10050X30, Lead Free=Yes, Manufacturer Part Number=RT0402FRE0710KL, Mouser Description="Thin Film Resistors - SMD 1/16W 10K ohm 1% 50ppm", Octopart=https://octopart.com/rt0402fre0710kl-yageo-1293756, RoHS=TRUE, Series=RT
R2: library part CMP-2000-07588-1, "Chip Resistor, 10 KOhm, +/- 1%, 0.1 W, -55 to 155 degC, 0402 (1005 Metric), RoHS, Tape and Reel", Case Code (Imperial)=0402, Case Code (Metric)=1005, Manufacturer=Panasonic, Max Operating Temperature=155degC, Max Power Dissipation=100mW, Min Operating Temperature=-55degC, Package Description="2-Pin Surface Mount Device, Body 1 x 0.5 mm", Package Quantity=1, Package Reference=402, Resistance=10KOhm, Temperature Coefficient=100ppm\/degreesC, Tolerance=1%, Voltage Rating=50V, Case\/Package=0402, Composition=ThickFilm, Contact Plating=Tin, Datasheet URL=https://industrial.panasonic.com/cdbs/www-data/pdf/RDA0000/AOA0000C304.pdf, Datasheet Version=02/2017, Depth=0.5mm, Height=0.35mm, Lead Free=LeadFree, Length=1mm, Manufacturer URL=http://www.panasonic.com/, Military Standard=Not, Mount=SurfaceMount, Mounting Technology=SurfaceMount, Number of Pins=2, Number of Terminations=2, Packaging=TapeandReel, Power Rating=100mW, Radiation Hardening=No, REACH SVHC=NoSVHC, RoHSCompliant=True, Termination=SMD/SMT, Voltage Rating (DC)=50V, Width=0.02inch
R3 R4 R5 R6: library part CMP-2002-08025-1, Manufacturer="Yageo / Phycomp", Part Number=RC0402JR-075K1L
R7: library part CMP-2002-00605-3, "Chip Resistor, 100 Ohm, +/- 1%, 100 mW, -55 to 155 degC, 0402 (1005 Metric), RoHS, Tape and Reel", Case Code (Imperial)=0402, Case Code (Metric)=1005, Manufacturer="Basic Passives", Max Operating Temperature="155 degC", Min Operating Temperature="-55 degC", Package Quantity=10000, Power Rating="100 mW", Resistance="100 Ohm", Tolerance=1%, Voltage Rating="50 V", Case\/Package=0402, ComponentLink1Description="Manufacturer URL", ComponentLink1URL=http://www.panasonic.com/, ComponentLink2Description=Datasheet, ComponentLink2URL=http://industrial.panasonic.com/cdbs/www-data/pdf/RDA0000/AOA0000C86.pdf, DatasheetVersion=04/2015, Height="0.35 mm", Length="1 mm", Mount="Surface Mount", Mounting Technology="Surface Mount", PackageDescription="2-Pin Surface Mount Device, Body 1 x 0.5 mm", PackageReference=0402, Packaging="Tape and Reel", PartNumber=ERJ-2RKF1000X, Pins=2, Radiation Hardening=No, REACH SVHC=Yes, RoHSCompliant=true, Width="0.5 mm"
R8: library part CMP-2002-03808-1, Manufacturer="KOA Speer", Part Number=RK73H1ETTP1001F
RJ1 RJ2: library part CMP-009-00116-2, Max Operating Temperature=155°C, Min Operating Temperature=-55°C, Pins=2
U2: library part CMP-2000-07604-2, "IC REG LINEAR 3.3V 300MA SOT23-5", Case/Package=SOT-23-5, Dropout Voltage=380mV, Max Input Voltage=5.5V, Max Operating Temperature=125°C, Max Output Current=300mA, Min Input Voltage=2.5V, Min Operating Temperature=-40°C, Nominal Output Voltage=3.3V, Operating Supply Current=42uA, Power Supply Rejection Ratio (PSRR)=60dB, Quiescent Current=38uA, Accuracy=3%, Height=1.1mm, Length=2.9mm, Mount="Surface Mount", Number of Outputs=1, Number of Pins=5, Output Current=300mA, Output Type=Fixed, Output Voltage=3.3V, Packaging="Tape and Reel", REACH SVHC="No SVHC", Width=1.6mm
Y1: library part CMP-27762-001729-1, "CRYSTAL 8.0000MHZ 18PF SMD", ESR (Equivalent Series Resistance)=80R, Frequency=8MHz, Frequency Stability=30ppm, Load Capacitance=18pF, Max Operating Temperature=85°C, Min Operating Temperature=-40°C, Operating Frequency="8 MHz", Package Quantity=1000, Depth=4.7mm, Frequency Tolerance=30ppm, Height=0.13inch, Lead Free="Lead Free", Length=11.4mm, Mount="Surface Mount", Number of Pins=2, Packaging="Tape and Reel", RoHS Compliant=Yes, Series=ABLS2, Series Resistance=80R, Termination=SMD/SMT, Tolerance=30ppm, Width=4.7mm

## Free pads (board coordinates)
  round 1.524 hole 3: 7(148.59,57.531) 8(146.812,84.709)

## Via types
v1: diameter 0.45, hole 0.3, Top Layer to Bottom Layer, tented both sides, 86 vias
v2: diameter 0.25, hole 0.25, Top Layer to Bottom Layer, tented both sides, 17 vias
v3: diameter 0.45, hole 0.45, Top Layer to Bottom Layer, tented both sides, 2 vias

## Nets (pads, with @x,y where several pads share a name; then routed paths per layer and width w, separated by ;. In a path a pad name is that pad's centre, name@x,y a point inside that pad or via, vN(x,y) a via of type N, cw(c..) or ccw(c..) an arc to the next point about the centre after c; other vN are vias at no path point)
3V3: C1.1 C2.2 C3.1 C11.1 C13.2 C14.2 C15.2 C16.2 C20.2 C21.2 C23.1 DPCON1.2 DPCON1.4 GYRO1.5 GYRO1.8 IC1.1 IC1.13 IC1.19 IC1.32 IC1.48 IC1.64 J4.1 R4.2 R5.2 U2.5 | length 35.5
  Top Layer w0.3: v1(146.183,75.684) 146.212,75.655 146.553,75.655 146.831,75.377 146.831,74.753 146.881,74.703 146.894,74.703 147.731,73.866 U2.5@147.731,73.086 ; R4.2 149.86,62.484 v1(150.368,61.976) 150.333,61.976 149.873,61.516 149.621,61.516 R5.2 ; v1(150.114,64.008) 150.085,64.037 150.016,64.037 149.479,64.574 C20.2 149.499,64.614 150.856,64.614 150.856,64.761 150.869,64.774 151.164,64.774 151.196,64.806 IC1.13 ; IC1.1 152.527,70.806 v1(152.527,71.374) ; C11.1 152.967,74.508 152.967,74.149 153.162,73.955 v1(153.162,73.914) ; v1(154.174,75.053) 154.174,74.426 C14.2 154.169,73.578 154.365,73.382 IC1.64 ; IC1.19 155.365,60.13 155.444,60.051 C15.2@155.444,59.556 ; C15.2 155.584,59.32 155.579,59.316 155.579,58.797 v1(155.829,58.547) ; IC1.32 161.865,60.131 162.067,59.929 162.478,59.929 162.683,59.724 C16.2@162.683,59.429 ; v1(162.687,58.547) 162.716,58.576 162.716,59.202 C16.2 ; v1(163.511,82.298) 163.511,80.164 163.792,79.883 C2.2 163.812,78.335 164.562,77.585 GYRO1.8 ; IC1.48 164.441,70.806 164.865,71.23 164.865,71.423 165.193,71.751 C13.2@165.488,71.751 ; C13.2 165.724,71.891 165.728,71.886 166.334,71.886 166.583,72.136 v1(166.624,72.136) ; GYRO1.5 166.362,77.885 167.752,79.275 C1.1 167.759,80.399 167.759,81.653 v1(167.767,81.661) ; DPCON1.2@172.974,60.707 172.331,60.707 171.831,61.207 v1(171.831,61.214) 172.324,61.707 172.626,61.707 DPCON1.4
5V: C7.1 DRV.3 L1.2 U2.1 U2.3 | length 16.2
  Top Layer w0.3: L1.2 140.284,74.887 140.485,75.088 C7.1 142.959,75.088 144.611,73.436 144.611,73.266 144.791,73.086 145.131,73.086 145.311,72.906 145.686,72.906 145.981,72.611 145.981,71.661 145.776,71.456 145.571,71.456 145.301,71.186 U2.3 144.961,69.725 142.466,67.23 DRV.3@142.466,66.929
AGND: C5.1 C6.1 DRV.2 DRV.26 DRV.41 R2.2 RJ1.1 | length 7.9
  Top Layer w0.203: v1(140.843,70.231) RJ1.1 RJ1.1@141.47,70.223
  Top Layer w0.3: v1(139.954,59.436) 139.954,59.477 140.059,59.582 140.059,60.078 140.179,60.198 C5.1 ; C5.1@140.339,60.318 140.339,60.658 140.466,60.785 DRV.26 ; DRV.2 142.966,66.885 142.966,67.18 143.486,67.7 C6.1 145.531,67.711 145.531,68.14 145.246,68.424 145.195,68.424 v1(145.166,68.453) ; R2.2 147.193,63.862 v1(147.193,63.881)
  other v2: 138.43,62.738 141.126,62.738 140.081,62.865 142.748,62.865 139.319,63.5 140.716,63.5 142.336,63.627 138.43,64.135 139.954,64.135 143.002,64.262 140.716,64.77 142.336,64.77 139.319,64.897 138.43,65.532 140.081,65.532 141.126,65.532 142.748,65.532
AVDD: C5.2 DRV.27 R3.1 R6.2 | length 4.2
  Top Layer w0.3: DRV.27 140.966,60.211 140.986,60.211 140.974,60.2 140.974,59.44 v1(140.97,59.436) ; v1(142.875,57.404) 142.904,57.433 142.904,58.228 R6.2 ; R3.1 147.004,65.18 147.799,65.18 v1(147.828,65.151)
BRAKE_4: DRV.35 R2.1 | length 1.7
  Top Layer w0.254: DRV.35 144.222,63.379 145.898,63.379 R2.1
CPH_4: C8.2 C9.1 DRV.7 DRV.8
CPL_4: C8.1 DRV.6 | length 2.3
  Top Layer w0.3: DRV.6 140.966,67.687 141.497,68.218 141.497,68.607 C8.1
DP_B2_2: DPCON1.23 IC1.54 | length 25.8
  Top Layer w0.3: IC1.54@159.365,72.263 159.365,71.781 159.737,71.408 159.737,70.768 v1(159.766,70.739) ; DPCON1.23 176.227,71.207 176.403,71.383 176.403,73.406 v1(175.768,74.041)
  Bottom Layer w0.3: v1(159.766,70.739) 163.579,74.552 171.11,74.552 171.237,74.425 173.388,74.425 173.772,74.041 v1(175.768,74.041)
DP_B3_2: DPCON1.24 IC1.40 | length 11.5
  Top Layer w0.3: IC1.40 165.864,66.806 170.765,71.707 DPCON1.24@173.355,71.707
DP_B4_2: DPCON1.25 IC1.42 | length 11.1
  Top Layer w0.3: IC1.42 166.231,67.806 170.632,72.207 DPCON1.25
DP_B5_2: DPCON1.26 IC1.57 | length 30.3
  Top Layer w0.3: v1(157.861,70.993) 157.865,70.997 IC1.57@157.865,73.025 ; DPCON1.26 174.239,72.707 175.064,71.882 v1(175.768,71.882)
  Bottom Layer w0.3: v1(157.861,70.993) 158.242,70.993 163.2,75.951 176.354,75.951 176.53,75.775 176.53,72.263 176.178,71.911 175.797,71.911 v1(175.768,71.882)
DP_B6_2: DPCON1.27 IC1.50 | length 19.8
  Top Layer w0.3: v1(161.29,71.247) 161.319,71.276 161.319,71.865 161.365,71.912 161.365,72.009 ; DPCON1.27 174.402,73.207 174.711,72.898 v1(175.768,72.898)
  Bottom Layer w0.3: v1(161.29,71.247) 164.206,74.163 170.949,74.163 171.076,74.036 173.227,74.036 173.738,73.525 175.141,73.525 v1(175.768,72.898)
DP_B7_2: DPCON1.28 IC1.62 | length 28.5
  Top Layer w0.3: v1(155.321,70.104) 155.321,71.055 155.365,71.099 IC1.62@155.365,72.644 ; DPCON1.28 174.176,73.707 175.768,75.299 v1(175.768,75.311)
  Bottom Layer w0.3: v1(155.321,70.104) 158.24,70.104 163.447,75.311 v1(175.768,75.311)
DP_DE_2: DPCON1.34 IC1.25 | length 25.3
  Top Layer w0.3: IC1.25@158.365,61.341 158.365,63.115 v1(158.369,63.119) ; v1(169.984,72.894) 169.984,74.36 172.331,76.707 DPCON1.34
  Bottom Layer w0.3: v1(158.369,63.119) 160.528,65.278 164.73,65.278 166.156,66.704 167.585,66.704 169.008,68.127 169.008,69.556 170.058,70.606 170.058,71.693 169.984,71.767 v1(169.984,72.894)
DP_DISP_2: DPCON1.31 IC1.34 | length 19.6
  Top Layer w0.3: IC1.34@163.703,63.806 167.842,63.806 v1(168.148,63.5) ; v1(171.392,72.894) 171.392,73.639 171.318,73.713 171.318,74.417 172.108,75.207 DPCON1.31
  Bottom Layer w0.3: v1(168.148,63.5) 168.148,64.266 171.948,68.066 171.948,70.574 171.196,71.326 171.196,72.069 171.363,72.236 171.363,72.865 v1(171.392,72.894)
DP_G2_2: DPCON1.15 IC1.8 | length 26.5
  Top Layer w0.3: IC1.8@152.146,67.306 157.921,67.306 164.14,61.087 166.751,61.087 172.126,66.462 172.126,67.002 172.331,67.207 DPCON1.15@173.228,67.207
DP_G3_2: DPCON1.16 IC1.39 | length 9.2
  Top Layer w0.3: IC1.39 166.086,66.306 166.216,66.436 170.195,66.436 171.466,67.707 172.466,67.707
DP_G4_2: DPCON1.17 IC1.29 | length 26.2
  Top Layer w0.3: IC1.29@160.365,61.468 160.365,62.2 160.372,62.208 160.372,62.582 v1(160.401,62.611) ; DPCON1.17 174.236,68.207 v1(174.244,68.199)
  Bottom Layer w0.3: v1(160.401,62.611) 166.116,56.896 168.021,56.896 170.307,59.182 170.307,63.119 174.244,67.056 v1(174.244,68.199)
DP_G5_2: DPCON1.18 IC1.9 | length 21.5
  Top Layer w0.3: IC1.9@152.908,66.806 153.752,66.806 154.391,66.167 v1(154.432,66.167) ; v1(167.513,67.564) 169.645,67.564 170.788,68.707 DPCON1.18
  Bottom Layer w0.3: v1(154.432,66.167) 158.369,66.167 159.766,67.564 v1(167.513,67.564)
DP_G6_2: DPCON1.19 IC1.38 | length 10.2
  Top Layer w0.3: 164.592,65.806 v1(166.477,65.806) ; v1(169.672,68.707) 170.172,69.207 DPCON1.19
  Bottom Layer w0.3: v1(166.477,65.806) 166.986,66.315 167.746,66.315 169.643,68.212 169.643,68.678 v1(169.672,68.707)
DP_G7_2: DPCON1.20 IC1.36 | length 11.8
  Top Layer w0.3: IC1.36 165.868,64.806 166.034,64.64 167.597,64.64 168.237,65.281 v1(168.272,65.281) ; v1(171.318,69.85) 171.359,69.85 171.502,69.707 172.466,69.707
  Bottom Layer w0.3: v1(168.272,65.281) 168.278,65.281 171.318,68.321 v1(171.318,69.85)
DP_HSYNC_2: DPCON1.32 IC1.37 | length 17.4
  Top Layer w0.3: IC1.37@163.576,65.306 166.088,65.306 166.365,65.029 166.969,65.029 v1(167.218,65.278) ; v1(170.688,73.533) 170.688,74.337 172.058,75.707 DPCON1.32
  Bottom Layer w0.3: v1(167.218,65.278) 167.259,65.278 170.688,68.707 v1(170.688,73.533)
DP_PCLK_2: DPCON1.30 IC1.35 | length 17.7
  Top Layer w0.3: IC1.35 165.818,64.306 165.873,64.251 168.984,64.251 169.059,64.326 v1(169.1,64.326) ; v1(172.085,73.406) 172.056,73.435 172.056,73.67 172.022,73.704 172.022,74.398 172.331,74.707 DPCON1.30@172.72,74.707
  Bottom Layer w0.3: v1(169.1,64.326) 169.128,64.355 169.128,64.607 172.337,67.816 172.337,71.967 172.085,72.219 v1(172.085,73.406)
DP_R2_2: DPCON1.7 IC1.15 | length 28.6
  Top Layer w0.3: IC1.15 153.259,63.806 153.797,63.268 v1(153.797,63.246) ; v1(171.577,62.484) 172.3,63.207 DPCON1.7@172.974,63.207
  Bottom Layer w0.3: v1(153.797,63.246) 161.163,55.88 167.894,55.88 170.815,58.801 170.815,61.722 v1(171.577,62.484)
DP_R3_2: DPCON1.8 IC1.26 | length 22.1
  Top Layer w0.3: IC1.26@158.865,60.96 158.865,60.244 158.572,59.951 158.572,58.667 159.71,57.528 169.288,57.528 170.688,58.928 170.688,62.486 171.909,63.707 172.927,63.707 DPCON1.8
DP_R4_2: DPCON1.9 IC1.21 | length 31.7
  Top Layer w0.3: IC1.21 156.365,60.874 156.365,60.324 159.549,57.139 176.79,57.139 177.203,57.552 177.203,59.782 176.149,60.836 176.149,61.929 173.871,64.207 DPCON1.9@173.482,64.207
DP_R5_2: DPCON1.10 IC1.41 | length 21.8
  Top Layer w0.3: v1(162.766,63.352) 162.766,67.101 162.971,67.306 163.068,67.306 ; IC1.41@163.47,67.306 IC1.41 ; v1(168.402,58.674) 169.799,60.071 169.799,62.269 172.237,64.707 DPCON1.10@172.974,64.707
  Bottom Layer w0.3: v1(162.766,63.352) 162.766,61.135 165.227,58.674 v1(168.402,58.674)
DP_R6_2: DPCON1.11 IC1.27 | length 21
  Top Layer w0.3: IC1.27@159.365,61.468 159.365,60.194 158.961,59.79 158.961,58.828 159.872,57.917 165.867,57.917 169.379,61.429 169.379,62.4 172.187,65.207 DPCON1.11@173.228,65.207
DP_R7_2: DPCON1.12 IC1.24 | length 21.2
  Top Layer w0.3: IC1.24@157.865,61.214 157.865,62.234 157.739,62.36 157.739,63.38 158.108,63.749 160.787,63.749 162.131,62.405 162.16,62.405 162.365,62.2 162.365,62.171 163.957,60.579 166.878,60.579 172.006,65.707 DPCON1.12
DP_VSYNC_2: DPCON1.33 IC1.20 | length 47.2
  Top Layer w0.3: IC1.20 155.865,60.274 159.388,56.75 176.951,56.75 177.592,57.391 177.592,59.943 177.165,60.37 177.165,75.817 176.775,76.207 DPCON1.33@173.228,76.207
DVDD_4: C6.2 DRV.1 | length 2.3
  Top Layer w0.3: DRV.1 143.466,66.885 143.501,66.92 C6.2
GND: C1.2 C2.1 C3.2 C11.2 C13.1 C14.1 C15.1 C16.1 C17.2 C18.2 C19.2 C20.1 C21.1 C22.2 C23.2 DPCON1.1 DPCON1.3 DPCON1.5 DPCON1.6 DPCON1.13 DPCON1.14 DPCON1.21 DPCON1.22 DPCON1.29 DPCON1.36 GYRO1.6 GYRO1.7 GYRO1.11 IC1.12 IC1.18 IC1.31 IC1.47 IC1.60 IC1.63 J4.3 R1.2 R8.1 RJ2.2 | length 50.4
  Top Layer w0.203: RJ2.2 v1(143.383,73.406)
  Top Layer w0.3: v1(145.161,74.803) C23.2 ; v1(150.109,66.167) 150.08,66.138 149.958,66.138 149.639,65.819 149.639,65.614 C20.1 149.499,65.434 C21.1@150.749,65.434 ; C21.1 151.387,65.414 151.495,65.306 IC1.12@152.273,65.306 ; v1(152.019,73.787) 152.019,73.828 152.127,73.936 152.127,74.458 152.118,74.468 C11.2 ; C19.2 C18.2 ; v1(154.813,58.547) 154.809,58.551 154.809,59.432 C15.1 154.865,59.497 IC1.18 ; 154.865,73.533 154.865,74.338 154.944,74.418 154.944,75.061 v1(155.193,75.31) ; R8.1 v1(156.337,57.658) ; v1(156.337,71.628) 156.365,71.656 IC1.60 ; C22.2 160.647,59.309 161.319,58.637 v1(161.319,58.605) C16.1@162.023,59.309 ; IC1.31 161.365,59.967 C16.1@162.023,59.309 ; v1(162.036,76.943) 162.036,76.941 162.41,76.567 162.41,76.554 R1.2@162.506,76.458 ; C16.1 C16.1@162.023,59.309 ; R1.2@162.433,76.581 163.274,76.581 163.771,76.085 GYRO1.11 ; IC1.47 164.823,70.306 165.608,71.091 C13.1 165.612,71.116 166.366,71.116 v1(166.37,71.12) 166.37,70.35 165.862,69.842 C17.2 ; v1(164.911,82.298) 164.911,80.182 164.612,79.883 C2.1 164.592,78.655 165.362,77.885 GYRO1.7 ; GYRO1.6 165.862,79.267 166.986,80.391 C1.2 167.02,80.489 167.013,80.497 167.013,81.359 166.751,81.62 v1(166.751,81.661) ; DPCON1.1 173.872,60.207 v1(174.371,60.706) ; DPCON1.5 v1(173.86,62.207) 173.86,62.456 173.821,62.495 173.788,62.495 173.576,62.707 DPCON1.6 ; DPCON1.13 174.126,66.207 174.34,66.421 v1@174.371,66.421 ; DPCON1.14 174.085,66.707 v1(174.435,66.357) ; DPCON1.21 174.041,70.207 v1(174.314,70.48) 174.087,70.707 DPCON1.22 ; DPCON1.29 173.576,74.207 173.871,74.207 174.215,74.551 174.215,74.652 v1(174.244,74.681) ; DPCON1.36 174.227,77.707 v1(174.244,77.724) ; DPCON1.3@173.609,61.207 173.871,61.207 v1(174.371,60.706)
  other v1: 154.686,82.55
GND_BK: C7.2 DRV.4 RJ1.2 RJ2.1 U2.2 | length 11.3
  Top Layer w0.089: 142.586,69.984 142.662,69.984
  Top Layer w0.203: RJ1.2 142.51,70.231 142.586,70.155 ; 143.345,72.136 143.383,72.174 RJ2.1
  Top Layer w0.3: DRV.4@141.966,66.385 141.966,67.083 141.966,67.531 142.586,68.151 142.586,69.984 142.586,70.155 ; 142.51,70.231 141.732,71.009 C7.2 142.995,72.486 143.345,72.136 U2.2
I2C_DIR_1: DRV.34 IC1.11 | length 11.7
  Top Layer w0.3: DRV.34 145.447,62.885 145.534,62.798 147.074,62.798 148.717,64.441 148.717,66.548 149.225,67.056 150.162,67.056 151.412,65.806 IC1.11
I2C_FAULT_1: DRV.40 IC1.10 R3.2 | length 9.6
  Top Layer w0.3: DRV.40 145.956,65.885 ; R3.2 145.956,65.885 ; IC1.10@151.765,66.306 151.495,66.306 150.237,67.564 147.241,67.564 145.956,66.279 145.956,65.885
I2C_FG_1: DRV.29 IC1.16 R6.1 | length 14
  Top Layer w0.3: DRV.29 141.966,61.385 141.966,60.99 143.002,59.954 ; R6.1 143.002,59.954 ; IC1.16 152.377,62.586 150.37,60.579 145.161,60.579 144.526,59.944 143.012,59.944 143.002,59.954
I2C_SCL_1: DRV.31 IC1.61 R4.1 | length 31.7
  Top Layer w0.3: DRV.31 142.966,61.385 142.966,61.09 143.171,60.885 144.07,60.885 145.278,62.093 v3(146.812,62.093) 146.841,62.122 147.416,62.122 147.779,62.484 R4.1 ; IC1.61@155.865,73.025 155.865,74.071 155.927,74.134 155.927,74.774 v1(155.956,74.803)
  Bottom Layer w0.3: v3(146.812,62.093) 146.304,62.601 146.304,71.884 151.509,77.089 154.305,77.089 155.927,75.467 155.927,74.832 v1(155.956,74.803)
I2C_SDA_1: DRV.30 IC1.59 R5.1 | length 33.8
  Top Layer w0.3: DRV.30 142.466,61.04 143.01,60.496 144.274,60.496 145.062,61.284 v3(145.796,61.284) ; v3@145.837,61.284 145.894,61.341 R5.1 ; v1(156.591,75.438) 156.591,74.231 156.865,73.957 156.865,73.533
  Bottom Layer w0.3: v3(145.796,61.284) 145.796,71.926 151.348,77.478 154.551,77.478 v1(156.591,75.438)
I2C_WAKE_1: DRV.28 IC1.58 | length 32.8
  Top Layer w0.3: DRV.28 141.466,60.785 141.703,60.548 141.703,60.098 v1(141.731,60.07) ; IC1.58@157.365,73.279 157.365,74.802 v1(157.364,74.803)
  Bottom Layer w0.3: v1(141.731,60.07) 141.731,68.411 151.187,77.867 155.053,77.867 157.364,75.556 v1(157.364,74.803)
INT2_3: GYRO1.9 R1.1 | length 2.6
  Top Layer w0.3: R1.1@162.433,77.581 163.212,77.581 163.709,77.085 GYRO1.9@164.846,77.085
LED_2: D1.2 IC1.17 | length 2.2
  Top Layer w0.3: D1.2@153.717,59.404 154.365,60.052 IC1.17
LED_RES_2: D1.1 R8.2 | length 1.2
  Top Layer w0.3: D1.1@153.532,57.758 154.592,57.758 R8.2
NRST_2: IC1.7 J4.5 | length 34.7
  Top Layer w0.3: v1(149.86,72.263) 149.86,74.93 147.574,77.216 145.288,77.216 144.526,77.978 144.526,80.01 145.448,80.932 148.369,80.932 151.135,83.698 156.85,83.698 158.782,85.63 J4.5 ; v1(151.13,67.676) 151.171,67.676 151.301,67.806 IC1.7
  Bottom Layer w0.3: v1(149.86,72.263) 149.86,70.838 149.606,70.584 149.606,69.2 v1(151.13,67.676)
OSC_IN_2: C18.1 IC1.5 Y1.2 | length 18.9
  Top Layer w0.3: IC1.5 151.306,68.806 151.13,68.982 151.13,74.928 154.584,78.382 157.046,78.382 Y1.2 ; Y1.2@156.506,78.749 Y1.2@156.515,78.74 ; Y1.2@157.649,79.13 C18.1
OSC_OUT_2: IC1.6 R7.1 | length 3.8
  Top Layer w0.3: R7.1 149.48,68.306 IC1.6
OSC_RES_2: C19.1 R7.2 Y1.1 | length 17.1
  Top Layer w0.3: Y1.1@147.015,78.74 149.976,78.74 150.622,78.094 150.622,71.52 R7.2 ; Y1.1@149.987,78.994 149.987,80.814 ; 149.987,80.941 151.446,82.4 151.446,82.45 151.546,82.55 C19.1
OUT_A_4: DRV.19 DRV.20 J1.3
OUT_B_4: DRV.16 DRV.17 J1.2
OUT_C_4: DRV.13 DRV.14 J1.1
PGND: C4.1 C10.2 DRV.12 DRV.15 DRV.18 DRV.21 J3.N | length 4.4
  Top Layer w0.3: v1(136.017,63.373) 136.029,63.385 DRV.18 ; v1(136.017,64.897) 136.029,64.885 DRV.15 ; v1(136.906,60.071) 136.935,60.1 136.935,60.354 137.966,61.385 DRV.21
SPI_CS_1: GYRO1.12 IC1.55 | length 8.4
  Top Layer w0.3: IC1.55@158.865,72.771 158.865,73.676 159.07,73.882 159.099,73.882 160.782,75.565 165.137,75.565 165.362,75.79 GYRO1.12
SPI_INT_1: GYRO1.4 IC1.56 | length 15.4
  Top Layer w0.3: IC1.56@158.365,72.263 158.365,73.783 160.909,76.327 160.909,77.851 161.798,78.74 v1(163.068,78.74) ; GYRO1.4 167.162,77.585 167.526,77.949 167.865,77.949 v1(167.894,77.978)
  Bottom Layer w0.3: v1(163.068,78.74) 163.83,77.978 v1(167.894,77.978)
SPI_SDI_1: GYRO1.14 IC1.53 | length 8.5
  Top Layer w0.3: IC1.53@159.865,73.279 159.865,74.013 160.917,75.065 166.204,75.065 166.379,75.241 166.379,75.547 166.362,75.565 GYRO1.14
SPI_SDO_1: GYRO1.1 IC1.52 | length 9
  Top Layer w0.3: IC1.52@160.365,73.025 160.365,73.878 161.163,74.676 166.58,74.676 166.907,75.003 166.907,76.085 GYRO1.1
SPI_SLCK_1: GYRO1.13 IC1.51 | length 12.7
  Top Layer w0.3: IC1.51@160.865,72.771 160.865,73.676 161.476,74.287 167.209,74.287 167.894,74.972 v1(167.894,76.581) ; GYRO1.13@165.862,75.946 v1(165.862,76.581)
  Bottom Layer w0.3: v1(165.862,76.581) v1(167.894,76.581)
SW_BK_4: DRV.5 L1.1 | length 9
  Top Layer w0.3: L1.1 138.43,70.993 140.116,69.307 140.992,69.307 141,69.299 141.194,69.299 141.202,69.307 141.359,69.307 141.992,69.307 142.197,69.102 142.197,68.312 141.466,67.581 DRV.5
SWCLK_2: IC1.49 J4.2 | length 24.8
  Top Layer w0.3: IC1.49 163.909,72.794 164.902,73.787 167.259,73.787 169.164,75.692 v1(169.164,81.534) ; J4.2 164.793,85.852 166.273,84.372 168.929,84.372 171.098,82.203 171.098,81.563 v1(171.069,81.534)
  Bottom Layer w0.3: v1(169.164,81.534) v1(171.069,81.534)
SWDIO_2: IC1.45 J4.4 | length 30
  Top Layer w0.3: J4.4 160.782,85.471 162.433,83.82 168.783,83.82 170.307,82.296 170.307,75.692 167.513,72.898 165.56,72.898 164.417,71.755 163.42,71.755 162.766,71.101 162.766,69.511 162.971,69.306 IC1.45
UART_RX_2: IC1.43 J4.7 | length 36.6
  Top Layer w0.3: J4.7 154.782,85.416 155.829,84.369 v1(155.829,84.328) ; v1(159.639,84.328) 160.655,84.328 161.671,83.312 168.656,83.312 169.794,82.174 169.794,75.772 167.418,73.396 165.344,73.396 164.353,72.405 163.52,72.405 162.377,71.262 162.377,68.9 162.971,68.306 IC1.43
  Bottom Layer w0.3: v1(155.829,84.328) v1(159.639,84.328)
UART_TX_2: IC1.14 J4.8 | length 35
  Top Layer w0.3: v1(148.902,72.263) 148.902,75.253 147.447,76.708 145.034,76.708 144.018,77.724 144.018,80.137 145.447,81.566 148.114,81.566 151.92,85.372 152.302,85.372 J4.8 ; v1(150.241,62.992) 150.27,63.021 150.27,63.081 151.494,64.306 IC1.14
  Bottom Layer w0.3: v1(148.902,72.263) 148.902,64.329 150.239,62.992 v1(150.241,62.992)
VCAP_1_2: C22.1 IC1.30 | length 2.7
  Top Layer w0.3: C22.1 159.708,59.309 159.894,59.495 159.894,59.79 160.217,60.113 160.542,60.113 160.865,60.436 160.865,60.916 IC1.30
VCAP_2_2: C17.1 IC1.46 | length 1.7
  Top Layer w0.3: 164.592,69.806 164.735,69.806 165.058,69.483 165.058,69.412 165.381,69.089 165.676,69.089 165.862,68.903 C17.1
VM: C4.2 C9.2 C10.1 DRV.9 DRV.10 DRV.11 J3.P
pads on no net: DPCON1.35 DPCON1.37 DPCON1.38 DPCON1.39 DPCON1.40 DRV.22 DRV.23 DRV.24 DRV.25 DRV.32 DRV.33 DRV.36 DRV.37 DRV.38 DRV.39 GYRO1.2 GYRO1.3 GYRO1.10 IC1.2 IC1.3 IC1.4 IC1.22 IC1.23 IC1.28 IC1.33 IC1.44 J1.MH1 J4.6 U2.4

## Polygon pours and split planes (outlines as drawn)
VM on Top Layer "VM_L01_P008" (solid, pour order 8): 138.303,66.294 138.43,66.167 139.573,66.167 139.687,66.281 139.687,67.196 139.192,67.691 138.811,67.691 138.811,68.707 137.668,69.85 135.89,69.85 135.005,70.735 135.01,75.703 138.304,78.994 140.843,78.994 141.986,80.137 141.986,85.725 140.97,86.741 135.763,86.741 135.005,85.983 135.005,81.792 130.683,77.47 130.683,70.993 133.223,68.453 136.682,68.453 136.682,67.661 137.033,67.31 138.303,67.31
CPH_4 on Top Layer "CPH_4_L01_P010" (solid, pour order 10): 140.843,68.961 139.065,68.961 139.065,67.945 139.446,67.945 139.874,67.517 139.874,66.257 140.552,66.257 140.589,66.294 140.589,67.945 140.843,68.199
PGND on Top Layer "PGND_L01_P009" (solid, pour order 9): 138.176,67.056 136.548,67.056 136.548,68.326 132.969,68.326 129.667,71.628 129.687,77.225 134.145,81.699 134.119,85.595 132.966,86.741 128.778,86.741 126.111,84.074 126.111,71.628 129.159,68.58 130.937,68.58 133.223,66.294 138.049,66.294
OUT_A_4 on Top Layer "OUT_A_4_L01_P002" (solid, pour order 2): 137.668,63.119 136.017,63.119 132.969,60.071 128.397,60.071 128.397,56.134 132.461,56.134 133.35,57.023 133.35,58.674 136.906,62.23 137.668,62.23
OUT_B_4 on Top Layer "OUT_B_4_L01_P001" (solid, pour order 1): 137.668,64.643 132.334,64.643 131.699,64.008 128.397,64.008 128.397,60.325 131.064,60.325 134.366,63.627 137.668,63.627
OUT_C_4 on Top Layer "OUT_C_4_L01_P000" (solid, pour order 0): 137.668,66.167 132.715,66.167 130.683,68.199 128.397,68.199 128.397,64.262 131.445,64.262 132.334,65.151 137.668,65.151
AGND on Bottom Layer "AGND_L04_P005" (solid, pour order 5): 136.017,67.691 136.017,60.579 145.288,60.579 145.288,67.691
GND on Ground "GND_L02_P013" (solid, pour order 13): 144.272,87.122 144.272,77.343 142.748,75.819 142.748,72.263 144.907,70.104 146.939,70.104 148.844,68.199 148.844,59.817 154.178,54.483 176.276,54.483 178.181,56.388 178.181,86.741 176.53,88.392 145.542,88.392
PGND on Ground "PGND_L02_P011" (solid, pour order 11): 126.619,88.392 142.113,88.392 143.383,87.122 143.383,78.867 141.478,76.962 137.033,76.962 135.636,75.565 135.636,68.961 137.795,66.802 137.795,55.626 136.652,54.483 127.127,54.483 124.968,56.642 124.968,86.741
AGND on Ground "AGND_L02_P012" (solid, pour order 12): 141.478,71.374 138.303,71.374 136.779,69.85 136.779,68.58 138.049,67.31 138.049,58.166 139.954,56.261 144.399,56.261 148.336,60.198 148.336,67.056 146.177,69.215 143.637,69.215